# EAGLE board mmcaudio (EAGLE 6.4)
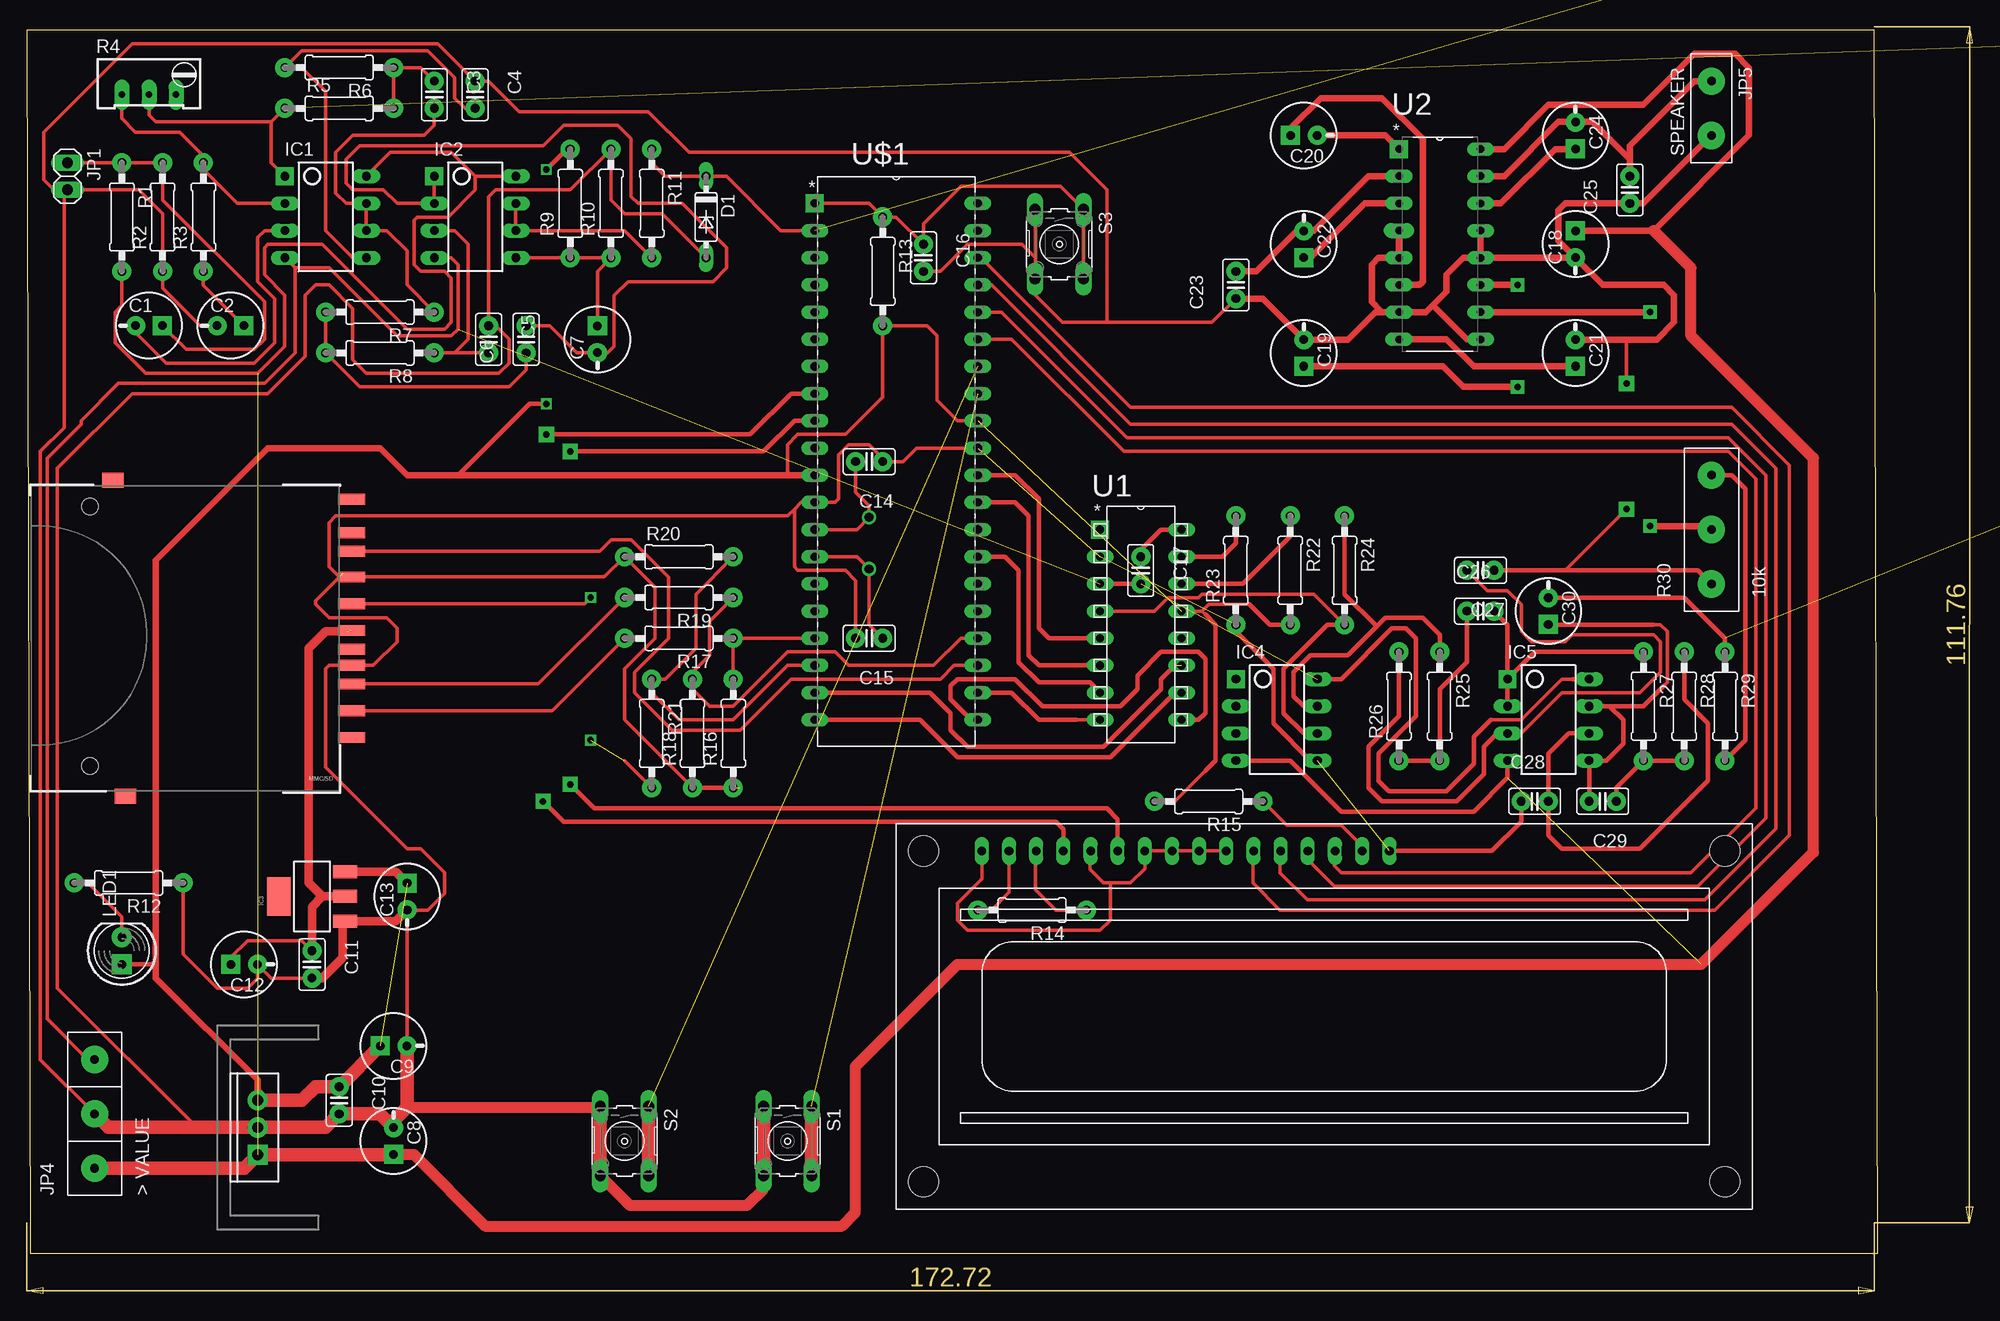
[diagram p0: board, top side]
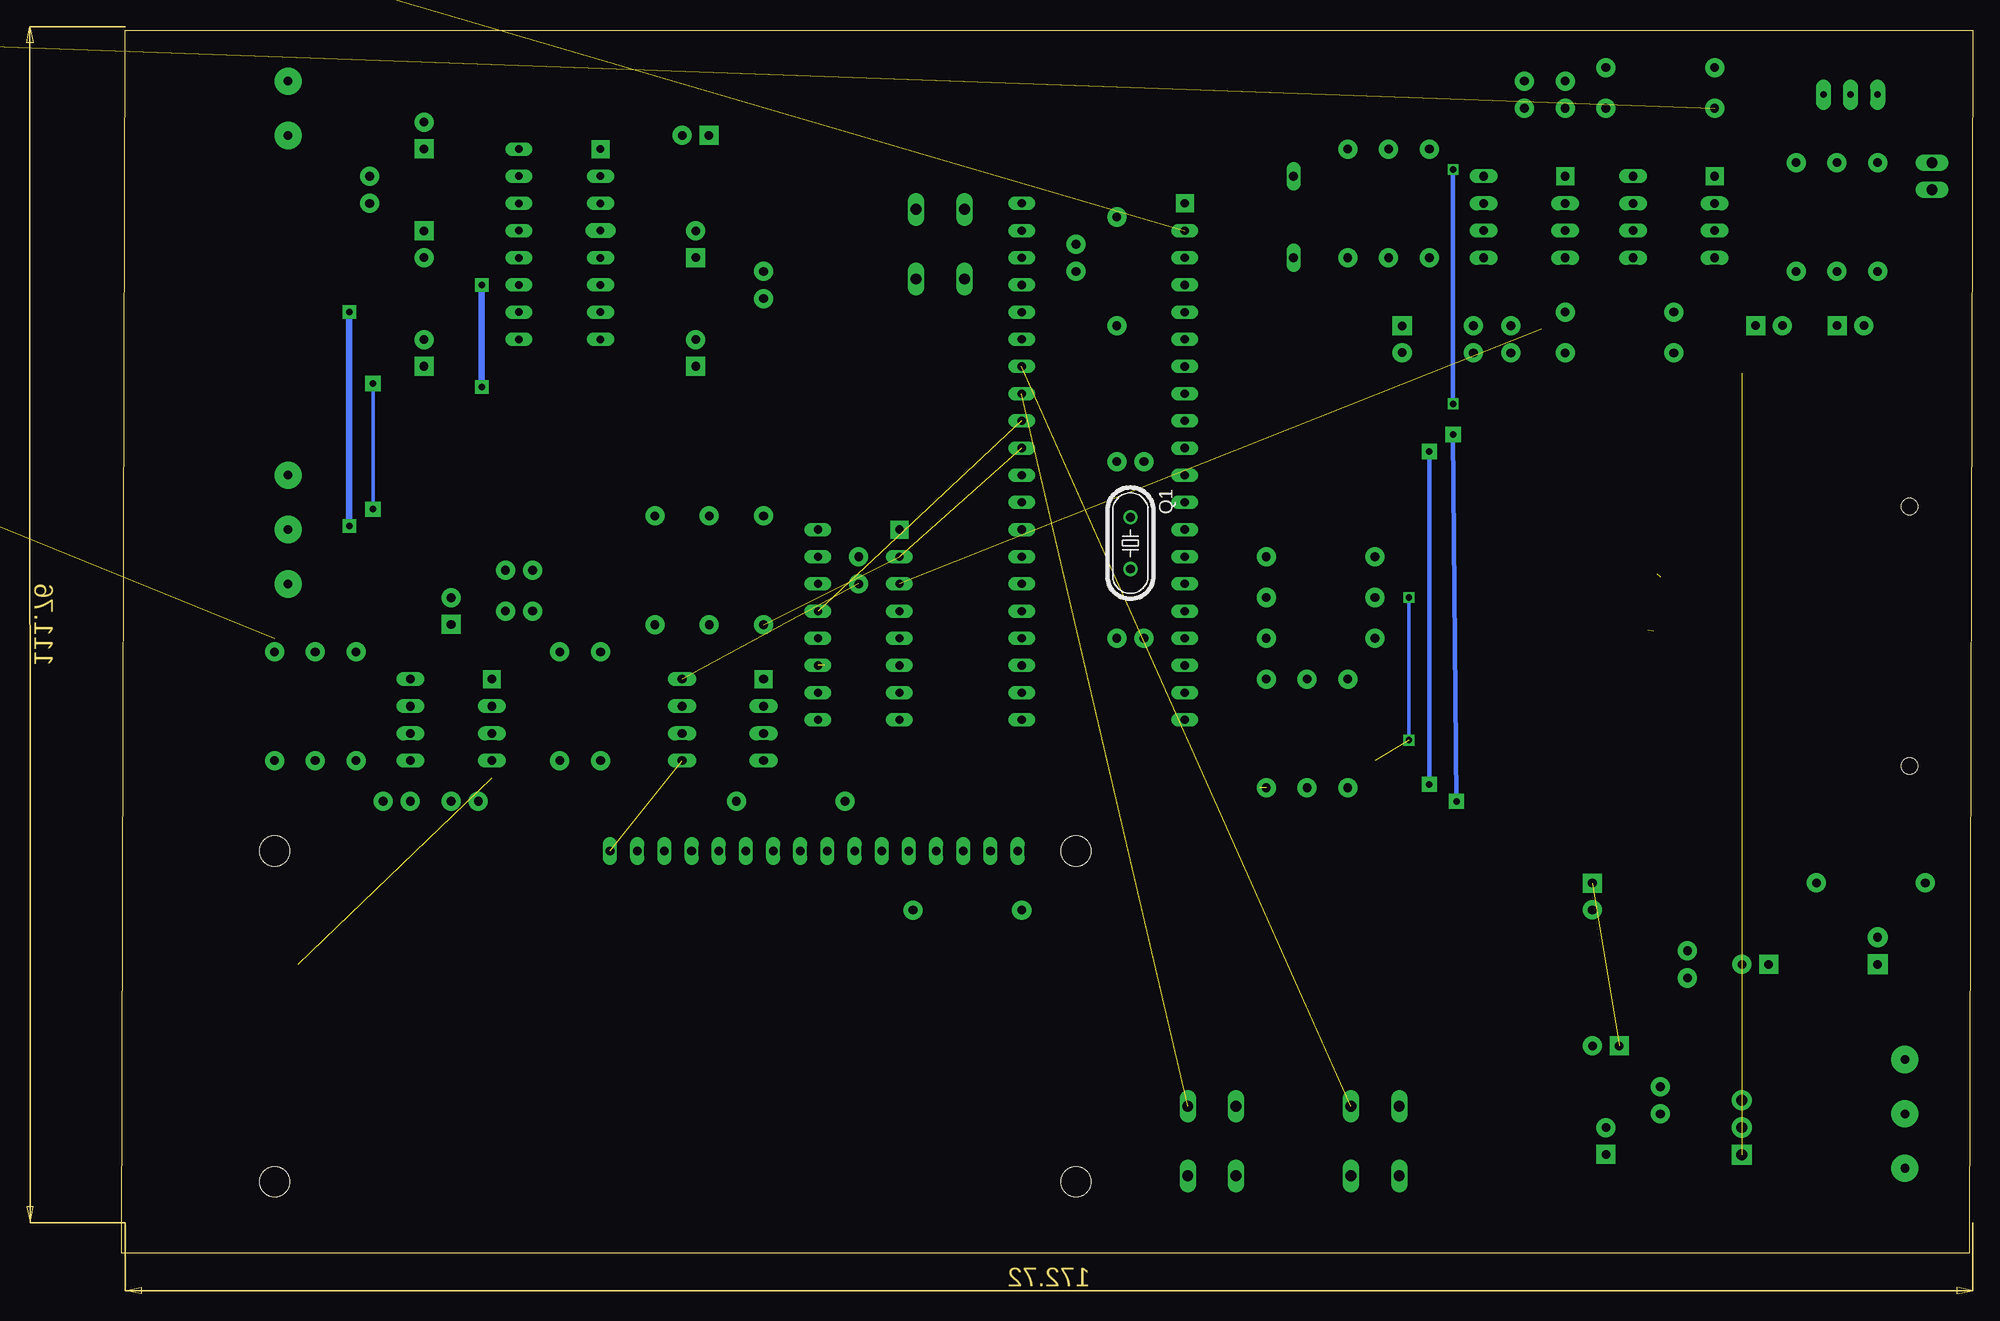
[diagram p1: board, bottom side, seen from below]

Size 181.91 x 118.41 mm. Coordinates in mm from the lower left corner, seen from the top.
Outline: 0.32,3.79 173.02,3.79 172.7,118.08 0,118.08 0.32,3.79
Copper layers (1*16): Top 0.035mm / dielectric 1.5mm / Bottom 0.035mm
Design rules "1-layer": minimum track width 10mil, minimum drill 24mil, track to track 10mil, track to pad 10mil, pad to pad 10mil, via to via 10mil, smd to smd 8mil, copper to edge 40mil, drill to drill 8mil, minimum pad ring 10mil, minimum via ring 8mil, stop-mask expansion 4mil, vias tented up to drill 0mil, thermal gap 10mil

## Footprints (pad centres in the part's own frame; a part is rotated, then mirrored left to right if it is on the bottom)
POL-CAP-COMMON = drill 0.8 pad 1.778 square: + 1.25,0 | drill 0.8 pad 1.778: - -1.25,0
C025-060X050 = drill 0.813 pad 1.778: 1 -1.27,0; 2 1.27,0
DO35Z7 = drill 0.813 long: A 3.81,0; C -3.81,0
DIP08 = drill 0.813 pad 1.676 square: 1 -3.81,-3.81 | drill 0.813 pad 1.27 long: 2 -1.27,-3.81; 3 1.27,-3.81; 4 3.81,-3.81; 5 3.81,3.81; 6 1.27,3.81; 7 -1.27,3.81; 8 -3.81,3.81
SOT223 = smd 1.219 x 2.235: 1 -2.311,-3.099; 2 0,-3.099; 3 2.311,-3.099 | smd 3.6 x 2.2: 4 0,3.099
1X02 = drill 1.016 long: 1 -1.27,0; 2 1.27,0
1X01 = drill 1.016 pad 1.778: 1 0,0
1X03/0.2" = drill 0.8 pad 2.54: 1 0,1.27; 2 5.08,1.27; 3 10.16,1.27
1X02/0.5" = drill 0.8 pad 2.54: 1 -3.81,0; 2 1.27,0
LED5MM = drill 0.813 pad 1.88 square: A -1.27,0 | drill 0.813 pad 1.88: K 1.27,0
TO220-IGO = drill 1 pad 1.88: GND 0,0; OUT 2.54,0 | drill 1 pad 1.88 square: IN -2.54,0
SDCARD_4UCONN = smd 2.54 x 1.016: 1 -1.159,6.77; 2 -1.159,4.27; 3 -1.159,2.52; 4 -1.159,-0.73; 5 -1.159,-3.23; 6 -1.159,-5.73; 7 -1.159,-8.15; 8 -1.159,-9.85; 9 -1.159,9.27; CD -1.159,1.02; WP -1.159,-13 | smd 2 x 1.4: SH@1 20,14.75; SH@2 21.15,-14.75 | hole 1.55: 23.3,11.94; 23.3,-12.32
HC49/S = drill 0.813: 1 -2.413,0; 2 2.413,0
R-US-COMMON = drill 0.813 pad 1.778: 1 -5.08,0; 2 5.08,0
RTRIM-COMMON = drill 0.61 pad 1.422 long: 1 1.27,-2.54; 2 1.27,0; 3 1.27,2.54
POT = drill 0.8 pad 2.54: 1 0,3.81; 2 0,-1.27; 3 0,-6.35
B3F-10XX = drill 1.016 long: 1 -3.251,2.261; 2 3.251,2.261; 3 -3.251,-2.261; 4 3.251,-2.261
DIP254P762X508-16 = drill 0.762 pad 1.676 square: 1 -7.62,17.78 | drill 0.762 pad 1.27 long: 2 -7.62,15.24; 3 -7.62,12.7; 4 -7.62,10.16; 5 -7.62,7.62; 6 -7.62,5.08; 7 -7.62,2.54; 8 -7.62,0; 9 0,0; 10 0,2.54; 11 0,5.08; 12 0,7.62; 13 0,10.16; 14 0,12.7; 15 0,15.24; 16 0,17.78
DIP254P762X510-16 = drill 0.7 pad 1.676 square: 1 -7.62,17.78 | drill 0.7 pad 1.27 long: 2 -7.62,15.24; 3 -7.62,12.7; 5 -7.62,7.62; 6 -7.62,5.08; 7 -7.62,2.54; 8 -7.62,0; 9 0,0; 10 0,2.54; 11 0,5.08; 12 0,7.62; 13 0,10.16; 14 0,12.7; 15 0,15.24; 16 0,17.78 | drill 0.7 pad 1.422 long: 4 -7.62,10.16
DIP254P1524X533-40 = drill 0.762 pad 1.676 square: 1 -15.24,48.26 | drill 0.762 pad 1.27 long: 2 -15.24,45.72; 3 -15.24,43.18; 4 -15.24,40.64; 5 -15.24,38.1; 6 -15.24,35.56; 7 -15.24,33.02; 8 -15.24,30.48; 9 -15.24,27.94; 10 -15.24,25.4; 11 -15.24,22.86; 12 -15.24,20.32; 13 -15.24,17.78; 14 -15.24,15.24; 15 -15.24,12.7; 16 -15.24,10.16; 17 -15.24,7.62; 18 -15.24,5.08; 19 -15.24,2.54; 20 -15.24,0; 21 0,0; 22 0,2.54; 23 0,5.08; 24 0,7.62; 25 0,10.16; 26 0,12.7; 27 0,15.24; 28 0,17.78; 29 0,20.32; 30 0,22.86; 31 0,25.4; 32 0,27.94; 33 0,30.48; 34 0,33.02; 35 0,35.56; 36 0,38.1; 37 0,40.64; 38 0,43.18; 39 0,45.72; 40 0,48.26
LCD1602 = drill 0.8 long: 1 8,33.46; 2 10.54,33.46; 3 13.08,33.46; 4 15.62,33.46; 5 18.16,33.46; 6 20.7,33.46; 7 23.24,33.46; 8 25.78,33.46; 9 28.32,33.46; 10 30.86,33.46; 11 33.4,33.46; 12 35.94,33.46; 13 38.48,33.46; 14 41.02,33.46; 15 43.56,33.46; 16 46.1,33.46 | hole 2.8: 2.54,2.54; 2.54,33.46; 77.46,33.46; 77.46,2.54

## Placement (x,y rotation side)
C1  10uF  [POL-CAP-COMMON]  11.43,90.47 0 top
C2  1uF  [POL-CAP-COMMON]  19.05,90.47 0 top
C3  223  [C025-060X050]  38.1,112.06 270 top
C4  222  [C025-060X050]  41.91,112.06 270 top
C5  103  [C025-060X050]  43.18,89.2 270 top
C6  223  [C025-060X050]  46.67,89.2 90 top
C7  10uF  [POL-CAP-COMMON]  53.34,89.2 90 top
C8  10uF  [POL-CAP-COMMON]  34.29,14.27 270 top
C9  10uF  [POL-CAP-COMMON]  34.29,23.16 180 top
C10  104  [C025-060X050]  29.21,18.08 270 top
C11  104  [C025-060X050]  26.67,30.78 270 top
C12  10uF  [POL-CAP-COMMON]  20.32,30.78 180 top
C13  10uF  [POL-CAP-COMMON]  35.56,37.13 90 top
C14  22p  [C025-060X050]  78.74,77.77 180 top
C15  22p  [C025-060X050]  78.74,61.26 180 top
C16  104  [C025-060X050]  83.82,96.82 270 top
C17  104  [C025-060X050]  104.14,67.61 270 top
C18  100uF  [POL-CAP-COMMON]  144.78,98.09 90 top
C19  100uF  [POL-CAP-COMMON]  119.38,87.93 270 top
C20  100uF  [POL-CAP-COMMON]  119.38,108.25 180 top
C21  100uF  [POL-CAP-COMMON]  144.78,87.93 270 top
C22  100uF  [POL-CAP-COMMON]  119.38,98.09 270 top
C23  104  [C025-060X050]  113.03,94.28 90 top
C24  100uF  [POL-CAP-COMMON]  144.78,108.25 270 top
C25  104  [C025-060X050]  149.86,103.17 90 top
C26  223  [C025-060X050]  135.89,63.8 0 top
C27  222  [C025-060X050]  135.89,67.61 180 top
C28  222  [C025-060X050]  140.97,46.02 0 top
C29  223  [C025-060X050]  147.32,46.02 180 top
C30  [POL-CAP-COMMON]  142.24,63.8 270 top
D1  Z-5V1  [DO35Z7]  63.5,100.63 270 top
IC1  TL082  [DIP08]  27.94,100.63 270 top
IC2  TL082  [DIP08]  41.91,100.63 270 top
IC3  LM1117  [SOT223]  26.67,37.13 90 top
IC4  TL082  [DIP08]  116.84,53.64 270 top
IC5  TL082  [DIP08]  142.24,53.64 270 top
JP1  [1X02]  3.81,104.44 270 top
JP2  [1X01]  not placed on the board
JP3  [1X01]  not placed on the board
JP4  [1X03/0.2"]  7.62,11.73 90 top
JP5  SPEAKER  [1X02/0.5"]  157.48,109.52 270 top
JP6  [1X01]  not placed on the board
LED1  [LED5MM]  8.89,32.05 90 top
LM1  [TO220-IGO]  21.59,15.54 90 top
MMC/SD  SD_CARD_SOCKET4UCON  [SDCARD_4UCONN]  29.21,61.26 180 top
Q1  [HC49/S]  78.74,70.15 270 bottom
R1  10k  [R-US-COMMON]  8.89,100.63 270 top
R2  10k  [R-US-COMMON]  12.7,100.63 90 top
R3  1k  [R-US-COMMON]  16.51,100.63 90 top
R4  100k  [RTRIM-COMMON]  11.43,113.33 270 top
R5  6.8k  [R-US-COMMON]  29.21,110.79 0 top
R6  27k  [R-US-COMMON]  29.21,114.6 180 top
R7  3.3k  [R-US-COMMON]  33.02,91.74 180 top
R8  3.3k  [R-US-COMMON]  33.02,87.93 180 top
R9  10k  [R-US-COMMON]  50.8,101.9 90 top
R10  10k  [R-US-COMMON]  54.61,101.9 90 top
R11  1k  [R-US-COMMON]  58.42,101.9 270 top
R12  330  [R-US-COMMON]  9.53,38.4 180 top
R13  10k  [R-US-COMMON]  80.01,95.55 270 top
R14  4k7  [R-US-COMMON]  93.98,35.86 180 top
R15  100  [R-US-COMMON]  110.49,46.02 180 top
R16  6.8k  [R-US-COMMON]  66.04,52.37 90 top
R17  6.8k  [R-US-COMMON]  60.96,61.26 180 top
R18  6.8k  [R-US-COMMON]  62.23,52.37 90 top
R19  6.8k  [R-US-COMMON]  60.96,65.07 180 top
R20  6.8k  [R-US-COMMON]  60.96,68.88 0 top
R21  6.8k  [R-US-COMMON]  58.42,52.37 270 top
R22  2k2  [R-US-COMMON]  118.11,67.61 270 top
R23  5k  [R-US-COMMON]  113.03,67.61 90 top
R24  2k2  [R-US-COMMON]  123.19,67.61 270 top
R25  6.8k  [R-US-COMMON]  132.08,54.91 270 top
R26  27k  [R-US-COMMON]  128.27,54.91 90 top
R27  1.5k  [R-US-COMMON]  151.13,54.91 270 top
R28  1.5k  [R-US-COMMON]  154.94,54.91 270 top
R29  10k  [R-US-COMMON]  158.75,54.91 270 top
R30  10k  [POT]  157.48,72.69 0 top
S1  [B3F-10XX]  71.12,14.27 270 top
S2  [B3F-10XX]  55.88,14.27 270 top
S3  [B3F-10XX]  96.52,98.09 270 top
U1  DAC0808LCN  [DIP254P762X508-16]  107.95,53.64 0 top
U2  TEA2025B  [DIP254P762X510-16]  135.89,89.2 0 top
U$1  PIC18F4520-I/P  [DIP254P1524X533-40]  88.9,53.64 0 top
X1  HD44780LCD-1602  [LCD1602]  81.28,7.92 0 top

## Library data of the parts
C1-C30 D1 LED1 MMC/SD R1-R30 = datle-discrete
IC1 IC2 IC4 IC5 = datle-analogic
IC3 LM1 = datle-powerIC
JP1-JP6 = datle-conn
Q1 = datle-discrete; OC_FARNELL: 1667008; OC_NEWARK: unknown
S1-S3 = datle-switch; MPN: B3F-1000; OC_FARNELL: 176432; OC_NEWARK: 36M3542
U1 = datle-analogic; MPN: DAC0808LCN; OC_FARNELL: 9486658; OC_NEWARK: 07B5074; PACKAGE: 16-DIP; SUPPLIER: National Semiconductor
U2 = datle-analogic; MPN: TEA2025B; OC_FARNELL: 1263004; OC_NEWARK: 89K1062; PACKAGE: PDIP-16; SUPPLIER: STMICROELECTRONICS
U$1 = datle-mcu; MPN: PIC18F4520-I/P; OC_FARNELL: 1212702; OC_NEWARK: 01M8488; PACKAGE: DIP-40; SUPPLIER: Microchip
X1 = datle-display

## Nets
+3V3: C11.1 C12.+ IC3.2 MMC/SD.4
+12V: C8.+ C18.+ IC1.8 IC2.8 IC4.4 IC5.4 JP4.1 LM1.IN R1.2 U2.16
-12V: C17.2 IC1.4 IC2.4 IC4.8 IC5.8 JP4.3 U1.3
A1-MSB: U1.5 U$1.30
A2: U1.6 U$1.29
A3: U1.7 U$1.27
A4: U1.8 U$1.22
A5: U1.9 U$1.21
A6: U1.10 U$1.20
A7: U1.11 U$1.19
A8: U1.12
ADC: D1.C JP3.1 R11.1 U$1.2
B1: S1.1 S1.2 U$1.33
B2: S2.1 S2.2 U$1.34
CLK: R20.2 R21.1 U$1.18
CONTR: R14.1 X1.3
CS: R16.2 R17.1 U$1.17
D4: U$1.38 X1.11
D5: U$1.37 X1.12
D6: U$1.36 X1.13
D7: U$1.35 X1.14
E: U$1.9 X1.6
GND: C2.- C4.1 C5.1 C8.- C9.- C10.2 C11.2 C12.- C13.- C14.1 C15.2 C16.2 C18.- C19.- C21.- C23.1 C25.1 C27.1 C28.1 D1.A IC3.1 IC4.5 JP1.2 JP4.2 JP5.2 LM1.GND MMC/SD.3 MMC/SD.6 R2.1 R10.2 R12.1 R16.1 R18.1 R20.1 R23.1 R30.3 S1.3 S1.4 S2.3 S2.4 S3.3 S3.4 U1.2 U2.4 U2.5 U2.7 U2.9 U2.12 U2.13 U$1.12 U$1.31 X1.16
IOUT: IC4.7 R24.1 R25.1
MISO: MMC/SD.7 U$1.23
MOSI: R18.2 R19.1 U$1.24
N$1: C1.- IC1.3
N$2: IC1.2 R3.2 R4.1
N$3: IC1.1 JP2.1 R4.2 R5.1
N$4: C3.1 R5.2 R6.1
N$5: C4.2 IC1.5 R6.2
N$6: C3.2 IC1.6 IC1.7 R7.1
N$7: C6.1 R7.2 R8.2
N$8: C5.2 IC2.3 R8.1
N$9: C6.2 C7.- IC2.1 IC2.2
N$10: C7.+ IC2.5 R9.1 R10.1
N$11: IC2.6 IC2.7 R11.2
N$13: C1.+ JP1.1 R1.1 R2.2
N$14: C26.1 R25.2 R26.1
N$15: C27.2 IC5.3 R26.2
N$16: C26.2 IC5.1 IC5.2 R27.1
N$17: C29.1 R27.2 R28.2
N$18: C28.2 IC5.6 R28.1
N$19: C29.2 C30.+ IC5.5 IC5.7
N$21: C30.- JP6.1 R29.1
N$22: C19.+ U2.11
N$23: C20.+ U2.6
N$24: C20.- U2.1
N$25: C24.- C25.2 JP5.1 U2.15
N$26: C24.+ U2.14
N$27: C22.- C23.2 U2.2
N$28: C22.+ U2.3
N$29: C21.+ U2.8
N$30: R29.2 R30.1
N$31: C2.+ R3.1
N$32: R15.1 X1.15
N$33: C17.1 U1.16
N$34: IC4.6 R24.2 U1.4
N$35: U$1.28
N$36: MMC/SD.1 R17.2
N$37: LED1.K R12.2
N$38: MMC/SD.2 R19.2
N$40: MMC/SD.5 R21.2
OSC1: C14.2 Q1.1 U$1.13
OSC2: C15.1 Q1.2 U$1.14
PGC: U$1.39
PGD: U$1.40
PWR_AMP: R30.2 U2.10
RESET: C16.1 R13.1 S3.1 S3.2 U$1.1
RS: U$1.8 X1.4
RX: U$1.26
TX: U$1.25
VCC: C9.+ C10.1 C13.+ IC3.3 LED1.A LM1.OUT R9.2 R13.2 R15.2 R22.2 U1.13 U$1.11 U$1.32
VDD: R14.2 X1.2
VREF+: R22.1 U1.14
VREF-: R23.2 U1.15
VSS: X1.1 X1.5 X1.7 X1.8 X1.9 X1.10

## Tracks (layer width: path | path; a pad name or v marks a point on that pad's centre or on a via)
+3V3  (1 unrouted)
  Top 0.305: C12.+ 19.07,31.43 20.64,33 25.72,33 C11.1
  Top 0.813: C11.1 26.67,36.18 27.62,37.13 | IC3.2 27.62,37.13 | 27.62,37.13 26.35,38.4 26.35,60.31 27.94,61.89 29.84,61.89
+12V  (2 unrouted)
  Top 0.305: IC2.8 41.91,104.44 | 41.91,104.44 39.69,106.66 33.97,106.66 IC1.8 | R1.2 8.89,92.38 8.26,91.74 8.26,88.88 11.11,86.03 21.59,86.03 24.13,88.57 24.13,93.33 22.23,95.23 22.23,97.77 22.54,98.09 27.62,98.09 35.56,90.15 39.05,90.15 39.69,90.79 39.69,94.92 39.05,95.55 36.83,95.55 36.2,96.19 36.2,100.31 36.51,100.63 39.37,100.63 41.91,103.17 41.91,104.44
  Top 0.406: IC5.4 138.43,48.24 135.25,45.07 122.87,45.07 118.11,49.83 IC4.4
  Top 0.61: U2.16 138.11,106.98 142.24,111.11 151.13,111.11 155.89,115.87 159.7,115.87 160.97,114.6 160.97,108.25 152.08,99.36 144.8,99.36 C18.+
  Top 1.016: C8.+ 36.17,13.02 42.86,6.33 76.2,6.33 77.47,7.6 77.47,21.25 87,30.78 156.53,30.78 167,41.26 167,78.09 155.57,89.52 155.57,95.87 152.08,99.36
  Top 1.27: JP4.1 20.32,11.73 LM1.IN 34.27,13 C8.+
-12V  (2 unrouted)
  Top 0.305: IC2.4 39.69,96.82 40.32,96.19 40.32,90.15 39.69,89.52 34.61,89.52 28.26,95.87 25.08,95.87 | JP4.3 5.71,21.89 1.91,25.7 1.91,78.09 5.08,81.26 5.08,81.58 8.57,85.07 22.23,85.07 25.08,87.93 25.08,95.87 | 25.08,95.87 IC1.4 | 136.84,53.64 139.7,53.64 143.51,57.45 144.46,57.45
  Top 0.406: IC5.8 144.46,57.45 | 136.84,53.64 135.25,52.05 135.25,49.51 132.72,46.97 127.32,46.97 126.36,47.92 126.36,50.46 129.86,53.96 129.86,61.26 128.91,62.21 127.64,62.21 122.87,57.45 IC4.8 | U1.3 C17.2
A1-MSB
  Top 0.406: U1.5 95.57,61.26 94.61,62.21 94.61,74.28 92.39,76.5 U$1.30
A2
  Top 0.406: U1.6 94.61,58.72 93.66,59.67 93.66,72.69 92.39,73.96 U$1.29
A3
  Top 0.406: U$1.27 91.44,68.88 92.71,67.61 92.71,59.04 94.61,57.13 99.38,57.13 U1.7
A4
  Top 0.305: 98.11,53.64 U1.8
  Top 0.406: U$1.22 92.08,56.18 94.61,53.64 98.11,53.64
A5
  Top 0.406: U$1.21 88.27,53.64 86.36,55.55 86.36,56.81 87,57.45 92.39,57.45 94.93,54.91 102.23,54.91 103.82,56.5 103.82,57.77 106.05,59.99 109.54,59.99 110.17,59.35 110.17,54.27 109.54,53.64 U1.9
A6
  Top 0.406: U$1.20 83.5,53.64 87,50.15 101.28,50.15 107.31,56.18 U1.10
A7  (1 unrouted)
  Top 0.406: U$1.19 84.45,56.18 86.36,54.27 86.36,52.69 87.95,51.1 100.65,51.1 106.05,56.5 106.05,57.45 107.31,58.72 108.58,58.72
ADC  (1 unrouted)
  Top 0.305: U$1.2 70.48,99.36 65.41,104.44 D1.C 59.69,104.44 58.42,105.71 R11.1
B1  (1 unrouted)
  Top 1.27: S1.1 S1.2
B2  (1 unrouted)
  Top 1.27: S2.1 S2.2
CLK
  Top 0.305: R20.2 62.55,65.39 62.55,60.31 59.69,57.45 R21.1 58.42,56.18 60.96,53.64 66.04,53.64 71.12,58.72 U$1.18
CONTR
  Top 0.305: R14.1 96.2,35.86 94.3,37.77 94.3,41.32 X1.3
CS
  Top 0.305: R16.2 R17.1 U$1.17
D4
  Top 0.305: U$1.38 89.22,96.82 103.19,82.85 159.38,82.85 164.78,77.45 164.78,42.84 157.8,35.86 117.16,35.86 114.62,38.4 114.62,41.32 X1.11
D5
  Top 0.305: U$1.37 90.17,94.28 103.19,81.26 159.38,81.26 163.51,77.14 163.51,43.48 156.84,36.81 119.7,36.81 117.16,39.35 117.16,41.32 X1.12
D6
  Top 0.305: U$1.36 91.12,91.74 102.87,79.99 159.07,79.99 162.56,76.5 162.56,44.43 156.21,38.08 122.24,38.08 119.7,40.62 119.7,41.32 X1.13
D7
  Top 0.305: U$1.35 92.08,89.2 102.55,78.72 159.07,78.72 161.61,76.18 161.61,45.38 155.57,39.35 122.87,39.35 122.24,39.99 122.24,41.32 X1.14
E  (via drill 0.6 pad 1.42)
  Top 0.406: X1.6 101.98,44.37 100.97,45.38 53.02,45.38 v50.8,47.61 | v50.8,78.72 68.9,78.72 71.75,81.58 U$1.9
  Bottom 0.406: v50.8,47.61 v50.8,78.72
GND  (via drill 0.6 pad 1.42)  (5 unrouted)
  Top 0.305: MMC/SD.6 53.99,66.99 R20.1 58.74,66.02 58.74,61.26 55.88,58.4 55.88,53.64 R18.1 | 29.53,67.29 26.99,64.75 26.99,64.44 28.26,63.16 33.66,63.16 34.61,62.21 34.61,60.94 32.41,58.74 MMC/SD.3 28.28,58.74 27.94,58.4 27.94,49.2 35.56,41.57 36.83,41.57 39.05,39.35 39.05,37.45 37.47,35.86 35.58,35.86 C13.- 35.54,35.86 C9.- | MMC/SD.6 30.46,66.99 30.48,66.98 | C2.- 16.19,90.47 12.7,93.96 R2.1 12.7,100.95 10.48,103.17 JP1.2 3.49,103.17 | D1.A 59.37,100.95 55.88,100.95 54.61,102.22 R10.2 50.8,103.17 43.81,103.17 43.18,102.54 C5.1 43.81,90.47 45.09,89.2 45.09,86.98 44.13,86.03 31.75,86.03 30.48,87.3 30.48,92.06 28.26,94.28 26.99,94.28 26.04,93.33 26.04,87.61 22.54,84.12 9.84,84.12 2.86,77.14 2.86,28.56 15.88,15.54 | C16.2 85.41,95.55 87.95,98.09 93.03,98.09 94.3,96.82 | 94.3,96.82 94.3,94.88 | 94.3,94.88 S3.4 | 94.3,96.82 94.3,101.3 S3.3 | 94.3,94.88 94.3,93.33 96.84,90.79 100.97,90.79 | 100.97,90.79 110.81,90.79 C23.1 | U$1.31 83.19,79.04 81.92,77.77 C14.1 80.01,78.09 78.74,79.36 76.83,79.36 75.88,78.41 75.88,74.28 75.56,73.96 U$1.12 72.39,73.96 71.75,73.33 | C15.2 77.47,66.66 76.52,67.61 72.07,67.61 71.75,67.93 71.75,73.33 | 3.49,103.17 2.54,103.17 1.59,104.12 1.59,108.57 9.84,116.82 38.42,116.82 C4.1 43.18,113.33 46.04,110.47 58.1,110.47 61.91,106.66 97.47,106.66 100.97,103.17 100.97,90.79 | C11.2 22.84,29.51 C12.- 21.59,30.76 21.59,29.51 20.64,28.56 17.78,28.56 14.61,31.73 R12.1 | 3.49,103.17 3.49,80.95 1.27,78.72 1.27,21.89 JP4.2 | MMC/SD.6 29.2,66.99 28.26,67.93 28.26,72.06 28.89,72.69 71.12,72.69 71.75,73.33 | C27.1 143.83,67.61 v149.54,73.33
  Top 0.305: v149.54,85.07 149.54,88.86 149.22,89.18
  Top 0.406: C27.1 156.21,67.61 R30.3 | X1.16 136.97,41.38 139.7,44.12 C28.1 | R23.1 113.03,61.89 116.52,58.4 116.52,53.32 120.02,49.83 IC4.5 | R18.1 66.67,47.29
  Top 0.61: U2.7 126.05,91.74 123.49,89.18 C19.- 115.55,93.01 C23.1 | U2.4 U2.5 126.36,96.82 125.73,96.19 125.73,92.69 126.68,91.74 U2.7 | C21.- 149.22,89.18 152.38,89.18 153.99,90.79 153.99,93.33 153.03,94.28 147.34,94.28 C18.- | U2.12 144.76,96.82 C18.- | U2.12 134.3,96.82 132.72,95.23 132.72,93.65 131.44,92.38 | 131.44,92.38 130.81,91.74 U2.7 | JP5.2 151.13,101.9 C25.1 143.83,101.9 143.19,101.27 143.19,98.43 C18.- | U2.12 U2.13 | U2.9 134.62,89.2 131.44,92.38
  Top 0.813: C13.- 34.5,34.82 IC3.1 29.53,34.58 29.53,31.41 27.62,29.51 C11.2
  Top 1.016: 35.56,17.45 53.54,17.45 S2.3 | 68.86,11.54 68.86,9.79 67.31,8.24 56.4,8.24 S2.4
  Top 1.27: JP4.2 7.62,15.54 15.88,15.54 LM1.GND 27.94,15.54 C10.2 33,16.81 C8.- 34.29,16.18 35.56,17.45 35.56,23.14 C9.- | S2.4 S2.3 | S1.3 68.86,11.54 S1.4
  Bottom 0.305: v149.54,73.33 v149.54,85.07
IOUT
  Top 0.406: IC4.7 119.38,54.91 118.43,55.86 118.43,58.09 120.02,59.67 123.51,59.67 126.21,62.37 | 126.21,62.37 127,63.16 130.49,63.16 132.08,61.58 R25.1 | R24.1 123.19,65.39 126.21,62.37
MISO
  Top 0.305: MMC/SD.7 53.55,69.41 54.61,70.47 56.52,70.47 60.01,66.98 60.01,61.26 56.83,58.09 56.83,56.18 60.33,52.69 66.67,52.69 71.44,57.45 85.41,57.45 86.68,58.72 U$1.23
MOSI
  Top 0.305: U$1.24 87.31,61.26 84.77,58.72 76.83,58.72 75.56,59.99 73.03,59.99 72.39,59.99 71.12,59.99 66.04,54.91 63.82,54.91 62.23,56.5 R18.2 62.23,58.09 63.82,59.67 63.82,62.85 R19.1
N$1
  Top 0.305: C1.- 10.18,89.82 13.02,86.98 21.27,86.98 23.18,88.88 23.18,93.01 21.59,94.6 21.59,98.73 22.23,99.36 IC1.3 23.5,99.36
N$2
  Top 0.305: IC1.2 19.68,101.9 16.51,105.08 R3.2 16.51,106.34 14.29,108.57 10.16,108.57 8.89,109.84 R4.1
N$3  (1 unrouted)
  Top 0.305: R4.2 11.43,110.16 12.06,109.52 22.86,109.52 | 22.86,109.52 R5.1 | 22.86,109.52 22.86,105.71 IC1.1
N$4
  Top 0.305: R5.2 R6.1 36.83,114.6 C3.1
N$5
  Top 0.305: C4.2 40.96,110.79 40.01,111.74 40.01,113.65 37.47,116.19 25.72,116.19 R6.2 25.72,114.6 27.94,112.38 27.94,99.36 30.48,96.82 IC1.5
N$6
  Top 0.305: C3.2 38.1,109.2 37.15,108.25 30.48,108.25 28.89,106.66 28.89,102.85 29.84,101.9 IC1.7 | 31.11,101.58 31.43,101.58 IC1.7 | IC1.7 IC1.6 33.66,99.36 35.56,97.46 35.56,94.28 R7.1
N$7
  Top 0.305: R7.2 R8.2 31.11,84.76 45.09,84.76 46.67,86.34 C6.1
N$8
  Top 0.305: C5.2 R8.1 40.01,87.93 41.27,89.2 41.27,98.09 40.01,99.36 IC2.3
N$9
  Top 0.305: IC2.1 IC2.2 34.61,101.9 33.34,103.17 30.48,103.17 29.84,103.81 29.84,106.03 31.11,107.3 48.26,107.3 50.16,109.2 55.24,109.2 56.52,107.93 56.52,102.54 57.15,101.9 61.28,101.9 65.41,97.77 65.41,95.87 64.14,94.6 56.2,94.6 54.93,93.33 54.93,88.57 54.29,87.93 53.36,87.93 C7.- 51.41,87.95 48.9,90.47 C6.2
N$10
  Top 0.305: C7.+ 53.34,95.55 R10.1 R9.1 IC2.5
N$11
  Top 0.305: IC2.7 IC2.6 55.88,99.36 R11.2
N$13
  Top 0.305: JP1.1 R1.1 R2.2 12.7,102.22 22.23,92.69 22.23,89.2 21.27,88.25 14.9,88.25 C1.+
N$14
  Top 0.406: R26.1 R25.2 132.08,56.5 134.62,59.04 C26.1
N$15
  Top 0.305: IC5.3 139.7,52.37 143.51,56.18 150.81,56.18 152.72,58.09 152.72,60.94 152.08,61.58 144.46,61.58 143.83,60.94 140.65,60.94 139.7,61.89 139.7,64.44 138.43,65.7 136.53,65.7 C27.2
  Top 0.406: R26.2 128.27,53.96 125.41,51.1 125.41,47.29 126.68,46.02 133.67,46.02 136.21,48.56 136.21,51.1 137.48,52.37 IC5.3
N$16
  Top 0.406: IC5.1 138.43,62.53 C26.2 | IC5.1 IC5.2 | R27.1 140.97,59.99 IC5.1
N$17
  Top 0.406: R28.2 R27.2 148.59,47.29 C29.1
N$18
  Top 0.406: IC5.6 144.15,52.37 142.24,50.46 C28.2 142.24,42.84 143.51,41.57 150.81,41.57 157.16,47.92 157.16,53.32 154.94,55.55 R28.1
N$19
  Top 0.305: 153.03,56.81 153.35,57.13 153.35,61.89 152.72,62.53 152.08,62.53
  Top 0.406: C29.2 IC5.5 147.64,49.83 149.22,51.42 149.22,53.64 147.96,54.91 IC5.7 151.13,54.91 153.03,56.81 | 152.08,62.53 142.26,62.53 C30.+
N$21  (1 unrouted)
  Top 0.406: R29.1 158.75,61.26 154.94,65.07 142.26,65.07 C30.-
N$22  (via drill 0.6 pad 1.27)
  Top 0.61: C19.+ 132.38,86.68 134.3,84.76 v139.38,84.76 | v139.38,94.28 U2.11
  Bottom 0.61: v139.38,84.76 v139.38,94.28
N$23
  Top 0.61: C20.+ 118.13,108.91 120.97,111.74 126.68,111.74 130.49,107.93 130.49,94.6 130.18,94.28 U2.6
N$24
  Top 0.61: C20.- 127,108.25 U2.1
N$25
  Top 0.61: C25.2 149.86,106.03 | 149.86,106.03 146.37,109.52 144.8,109.52 C24.- 144.76,109.52 143.19,109.52 138.11,104.44 U2.15 | JP5.1 155.89,113.33 149.86,107.3 149.86,106.03
N$26
  Top 0.61: U2.14 137.79,101.9 142.88,106.98 144.76,106.98 C24.+
N$27
  Top 0.61: C23.2 114.94,95.55 118.75,99.36 119.36,99.36 C22.- 120.31,99.34 125.41,104.44 U2.2
N$28
  Top 0.61: U2.3 125.09,101.9 120.02,96.82 119.4,96.82 C22.+
N$29
  Top 0.61: U2.8 132.72,89.2 135.25,86.66 144.76,86.66 C21.+
N$30
  Top 0.406: R30.1 159.38,76.5 160.66,75.23 160.66,51.73 R29.2
N$31
  Top 0.305: R3.1 16.51,94.26 C2.+
N$32
  Top 0.305: X1.15 124.84,41.83 122.87,43.8 117.79,43.8 R15.1
N$33
  Top 0.406: C17.1 104.14,69.52 106.05,71.42 U1.16
N$34
  Top 0.305: U1.4 105.41,63.8 106.68,65.07 109.54,65.07 109.86,65.39 120.33,65.39 R24.2
  Top 0.406: IC4.6 119.38,52.37 117.47,54.27 117.47,58.4 121.6,62.53 R24.2
N$36
  Top 0.305: MMC/SD.1 49.11,54.49 R17.2
N$37
  Top 0.305: R12.2 5.71,38.4 8.89,35.23 LED1.K
N$38
  Top 0.305: MMC/SD.2 47.8,56.99 R19.2
N$40  (via drill 0.6 pad 0.81)  (1 unrouted)
  Top 0.305: MMC/SD.5 52.12,64.49 v52.7,65.07 | 55.88,49.83 R21.2
  Bottom 0.305: v52.7,65.07 v52.7,51.73
OSC1
  Top 0.305: U$1.13 77.6,71.42 Q1.1 78.74,73.64 77.47,74.91 C14.2
OSC2
  Top 0.305: U$1.14 77.6,68.88 Q1.2 78.74,62.53 C15.1
PWR_AMP  (via drill 0.6 pad 1.27)
  Top 0.61: U2.10 v151.76,91.74 | v151.76,71.74 157.16,71.74 R30.2
  Bottom 0.61: v151.76,91.74 v151.76,71.74
RESET
  Top 0.305: U$1.1 78.74,101.9 R13.1 81.28,100.63 C16.1 83.82,100 87.31,103.49 96.63,103.49 S3.1 S3.2
RS  (via drill 0.6 pad 1.42)
  Top 0.406: X1.4 96.9,43.42 96.2,44.12 50.16,44.12 v48.26,46.02 | v48.58,80.31 67.63,80.31 71.44,84.12 U$1.8
  Bottom 0.406: v48.26,46.02 v48.58,80.31
VCC  (via drill 0.6)  (2 unrouted)
  Top 0.305: U$1.32 87,81.58 85.09,83.48 85.09,89.52 84.14,90.47 R13.2 80.01,83.8 76.52,80.31 72.07,80.31 71.12,79.36 71.12,76.82 71.44,76.5 | 114.3,64.44 110.49,64.44 109.86,63.8 | 109.86,63.8 U1.13 | R15.2 107.31,46.02 110.17,48.88 | 110.17,63.48 109.86,63.8
  Top 0.406: R22.2 116.2,62.53 114.3,64.44 | LED1.A 11.75,30.78 12.06,31.1 | R9.2 50.48,106.98 v48.58,105.08 | v48.58,83.17 46.99,83.17 40.32,76.5 | 110.17,63.48 111.12,62.53 111.12,49.83 110.17,48.88
  Top 0.61: U$1.11 71.44,76.5 40.32,76.5 35.56,76.5 33.02,79.04 22.54,79.04 12.06,68.56 12.06,31.1 12.06,29.51 21.59,19.98 21.59,19.03 22.54,18.08
  Top 0.813: IC3.3 34.5,39.44 C13.+
  Top 1.27: LM1.OUT 22.54,18.08 25.72,18.08 26.99,19.35 C10.1 29.23,19.35 C9.+
  Bottom 0.406: v48.58,105.08 v48.58,83.17
VDD
  Top 0.305: X1.2 91.82,37.51 90.17,35.86 R14.2
VREF+
  Top 0.406: U1.14 113.67,66.34 118.11,70.79 R22.1
VREF-
  Top 0.406: U1.15 111.76,68.88 113.03,70.15 R23.2
VSS
  Top 0.305: X1.10 X1.9 X1.8 X1.7 104.52,39.73 103.19,38.4 101.28,38.4 | 101.28,38.4 100.65,38.4 99.38,39.67 99.38,41.32 X1.5 | X1.1 89.28,38.78 87,36.49 87,34.91 87.95,33.95 100.33,33.95 101.28,34.91 101.28,38.4